# EAGLE board badge_rev03 (EAGLE 5.06)
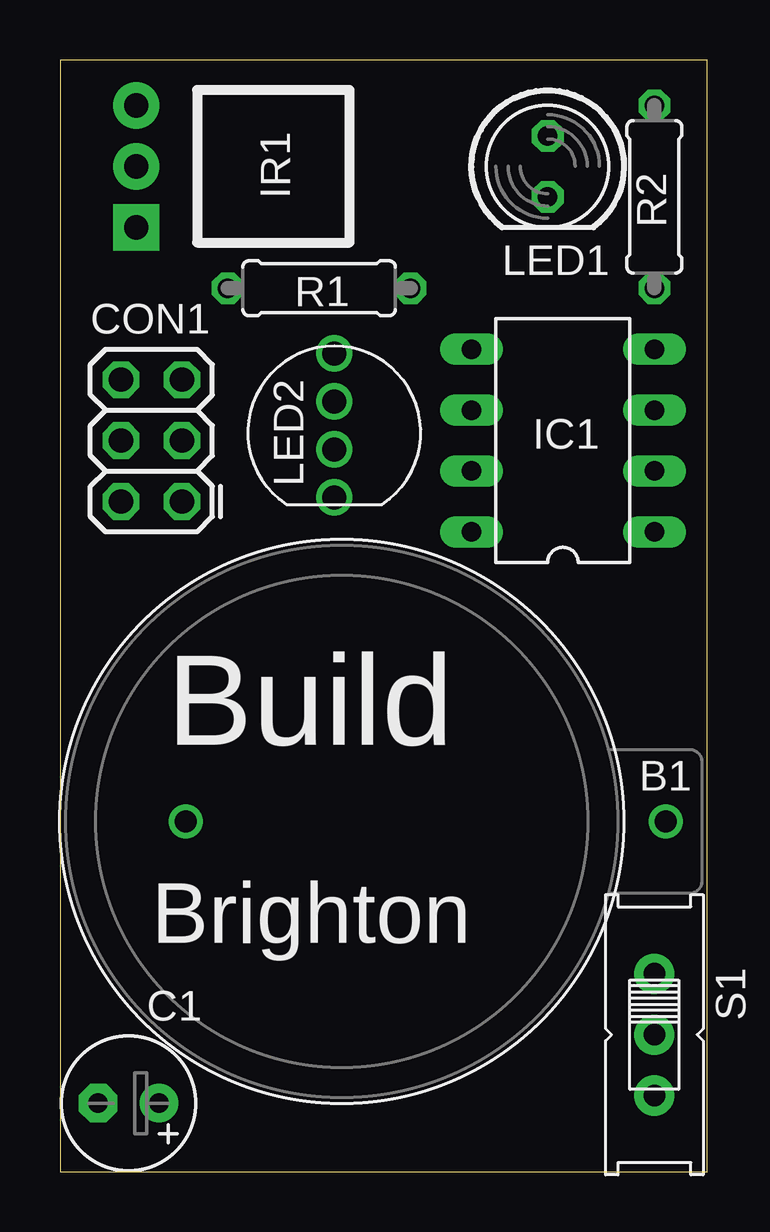
[diagram p0: board, top side]
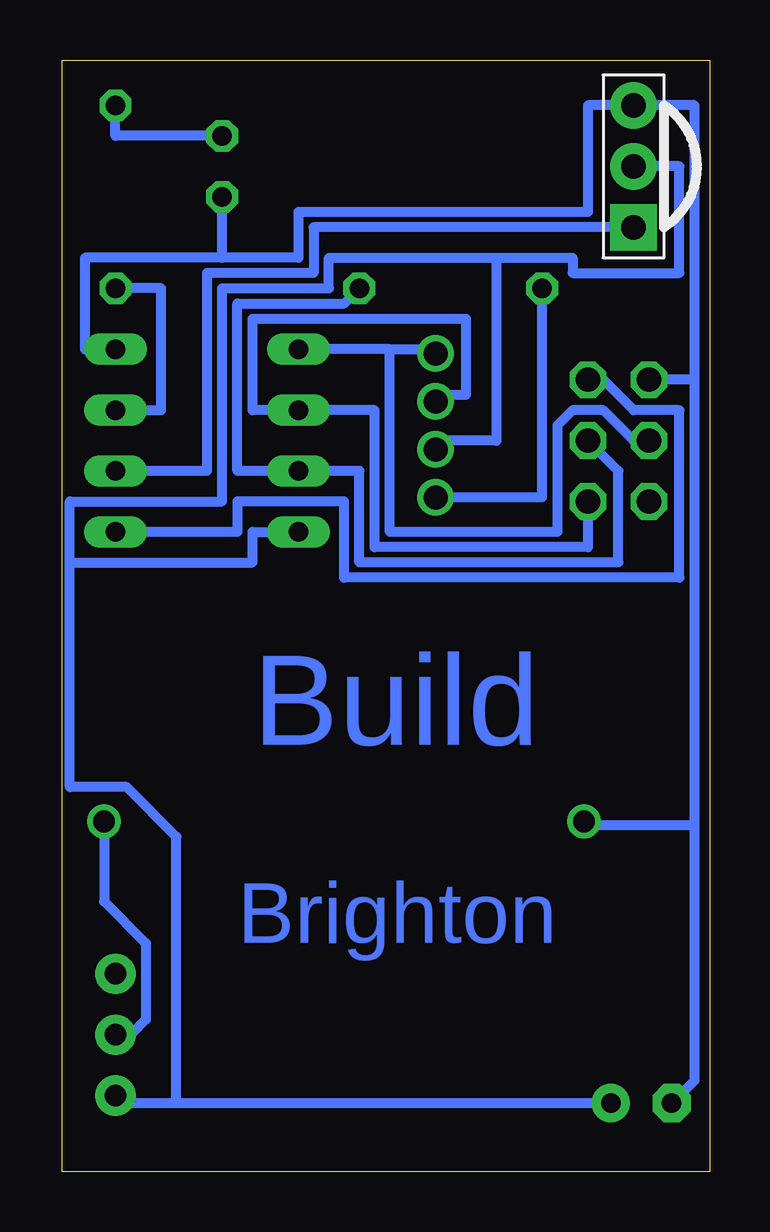
[diagram p1: board, bottom side, seen from below]

Size 26.98 x 46.34 mm. Coordinates in mm from the lower left corner, seen from the top.
Outline: 0,0 26.98,0 26.98,46.34 0,46.34 0,0
Copper layers (1*16): Top 0.035mm / dielectric 1.5mm / Bottom 0.035mm
Design rules "default *": minimum track width 10mil, minimum drill 24mil, track to track 8mil, track to pad 8mil, pad to pad 8mil, via to via 8mil, smd to smd 8mil, copper to edge 40mil, drill to drill 8mil, minimum pad ring 10mil, minimum via ring 8mil, stop-mask expansion 4mil, vias tented up to drill 0mil, thermal gap 10mil

## Footprints (pad centres in the part's own frame; a part is rotated, then mirrored left to right if it is on the bottom)
CR2032 = drill 0.9 round: + 10,0; - -10,0
E2,5-6 = drill 0.813 pad 1.6 round: + -1.27,0 | drill 0.813 pad 1.6 octagon: - 1.27,0
2X3 = drill 1.016 octagon: 1 0,0; 2 0,2.54; 3 2.54,0; 4 2.54,2.54; 5 5.08,0; 6 5.08,2.54
DIL08 = drill 0.813 long: 1 -3.81,-3.81; 2 -1.27,-3.81; 3 1.27,-3.81; 4 3.81,-3.81; 5 3.81,3.81; 6 1.27,3.81; 7 -1.27,3.81; 8 -3.81,3.81
PNA460XM = drill 1.016 pad 1.93 square: 1 -2.54,0 | drill 1.016 pad 1.93 round: 2 0,0; 3 2.54,0
LED5MM = drill 0.813 octagon: A -1.27,0; K 1.27,0
LED-TRICOLOR-THROUGHHOLE = drill 1 round: BLU 1,0; GND -1,0; GRN 3,0; RED -3,0
0207/7 = drill 0.813 octagon: 1 -3.81,0; 2 3.81,0
EG1218 = drill 0.9 pad 1.676 round: O -2.54,0; P 0,0; S 2.54,0

## Placement (x,y rotation side)
B1  [CR2032]  15.24,14.61 0 top
C1  [E2,5-6]  2.86,2.86 180 top
CON1  AVR_SPI_PRG_6PTH  [2X3]  5.08,27.94 90 top
IC1  ATTINY25/45/85V-10P  [DIL08]  20.95,30.48 90 top
IR1  PNA460XM  [PNA460XM]  3.17,41.91 90 bottom
LED1  [LED5MM]  20.32,41.91 270 top
LED2  RGB-CA  [LED-TRICOLOR-THROUGHHOLE]  11.43,31.11 90 top
R1  [0207/7]  10.79,36.83 180 top
R2  [0207/7]  24.77,40.64 90 top
S1  [EG1218]  24.77,5.71 270 top

## Library data of the parts
B1 = microbuilder
C1 R1 R2 = rcl
CON1 LED2 = SparkFun
IC1 = avr-4
IR1 S1 = adafruit
LED1 = led

## Nets
GND: B1.- C1.- CON1.6 IC1.4 IR1.3 LED1.K
N$1: CON1.3 IC1.7 R1.1
N$2: LED2.RED R1.2
N$3: CON1.4 IC1.5 LED2.GRN
N$4: CON1.1 IC1.6 LED2.BLU
N$5: IC1.3 R2.1
N$6: IC1.2 IR1.1
N$7: LED1.A R2.2
N$8: B1.+ S1.P
N$9: CON1.5 IC1.1
VCC: C1.+ IC1.8 IR1.2 LED2.GND S1.S

## Tracks (layer width: path | path; a pad name or v marks a point on that pad's centre or on a via)
GND
  Bottom 0.406: 0.64,33.02 CON1.6 | 20.32,38.1 17.14,38.1 17.14,40.01 5.08,40.01 5.08,44.45 IR1.3 0.64,44.45 0.64,33.02 | 20.32,38.1 26.04,38.1 26.04,34.29 IC1.4 | 20.32,38.1 LED1.K | 0.64,14.45 5.08,14.45 B1.- | 0.64,14.45 0.64,33.02 | 0.64,14.45 0.64,3.81 C1.-
N$1
  Bottom 0.406: CON1.3 3.81,29.21 3.81,25.4 14.61,25.4 14.61,29.21 IC1.7 19.68,29.21 19.68,36.2 15.24,36.2 R1.1
N$2
  Bottom 0.406: R1.2 6.99,28.11 LED2.RED
N$3
  Bottom 0.406: 13.34,34.29 13.34,26.67 6.35,26.67 6.35,31.11 5.71,31.75 4.45,31.75 3.17,30.48 CON1.4 | 13.34,34.29 IC1.5 | 13.34,34.29 11.61,34.29 LED2.GRN
N$4
  Bottom 0.406: CON1.1 5.08,26.04 13.97,26.04 13.97,31.75 IC1.6 19.05,31.75 19.05,35.56 10.16,35.56 10.16,32.38 11.16,32.38 LED2.BLU
N$5
  Bottom 0.406: R2.1 22.86,36.83 22.86,31.75 IC1.3
N$6
  Bottom 0.406: IC1.2 20.95,29.21 20.95,37.47 16.51,37.47 16.51,39.37 IR1.1
N$7
  Bottom 0.406: LED1.A 24.77,43.18 R2.2
N$8
  Bottom 0.406: B1.+ 25.24,11.27 23.5,9.53 23.5,6.35 24.13,5.71 S1.P
N$9
  Bottom 0.406: CON1.5 4.45,33.02 3.17,31.75 1.27,31.75 1.27,24.77 15.24,24.77 15.24,27.94 19.68,27.94 19.68,26.67 IC1.1
VCC
  Bottom 0.406: 8.89,38.1 8.89,30.48 11.06,30.48 LED2.GND | 8.89,38.1 15.88,38.1 15.88,36.83 20.32,36.83 20.32,27.94 26.67,27.94 26.67,25.4 | 26.67,25.4 26.67,16.04 24.29,16.04 22.23,13.97 22.23,2.86 | IC1.8 19.05,26.67 19.05,25.4 26.67,25.4 | IR1.2 1.27,41.91 1.27,37.47 5.71,37.47 5.71,38.1 8.89,38.1 | C1.+ 22.23,2.86 | 22.23,2.86 24.45,2.86 S1.S

## Text on the board
Bottom: Build | Brighton
tNames: Build | Brighton